# EAGLE board KickerBoard_rotated (EAGLE 9.2.0)
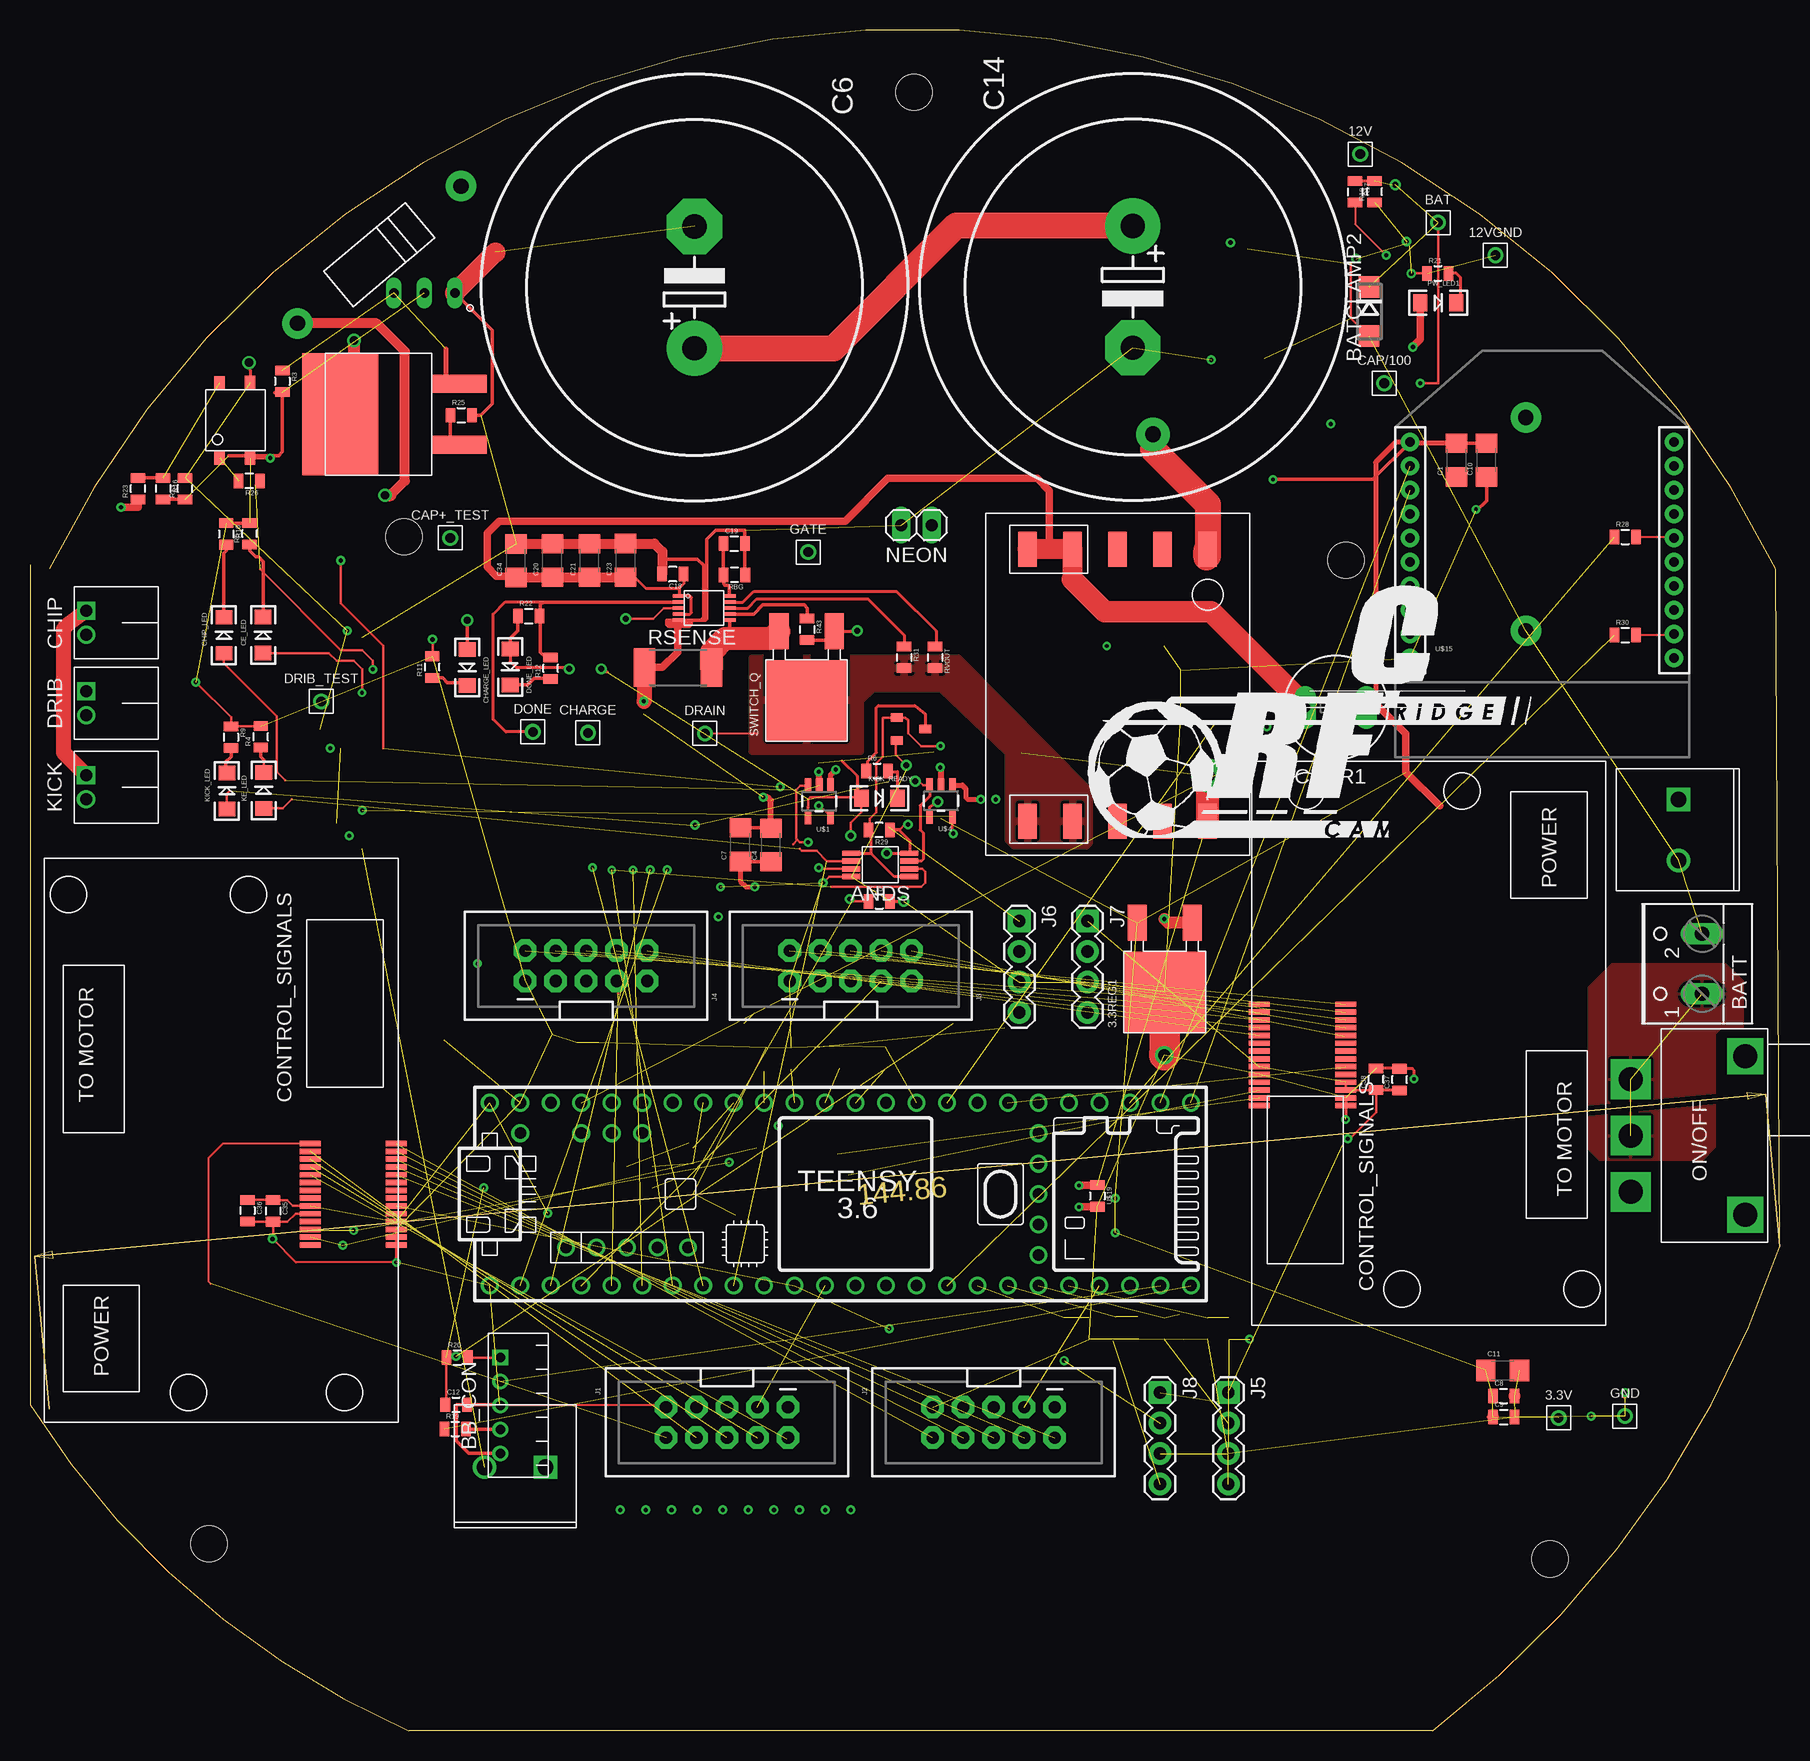
[diagram p0: board, top side]
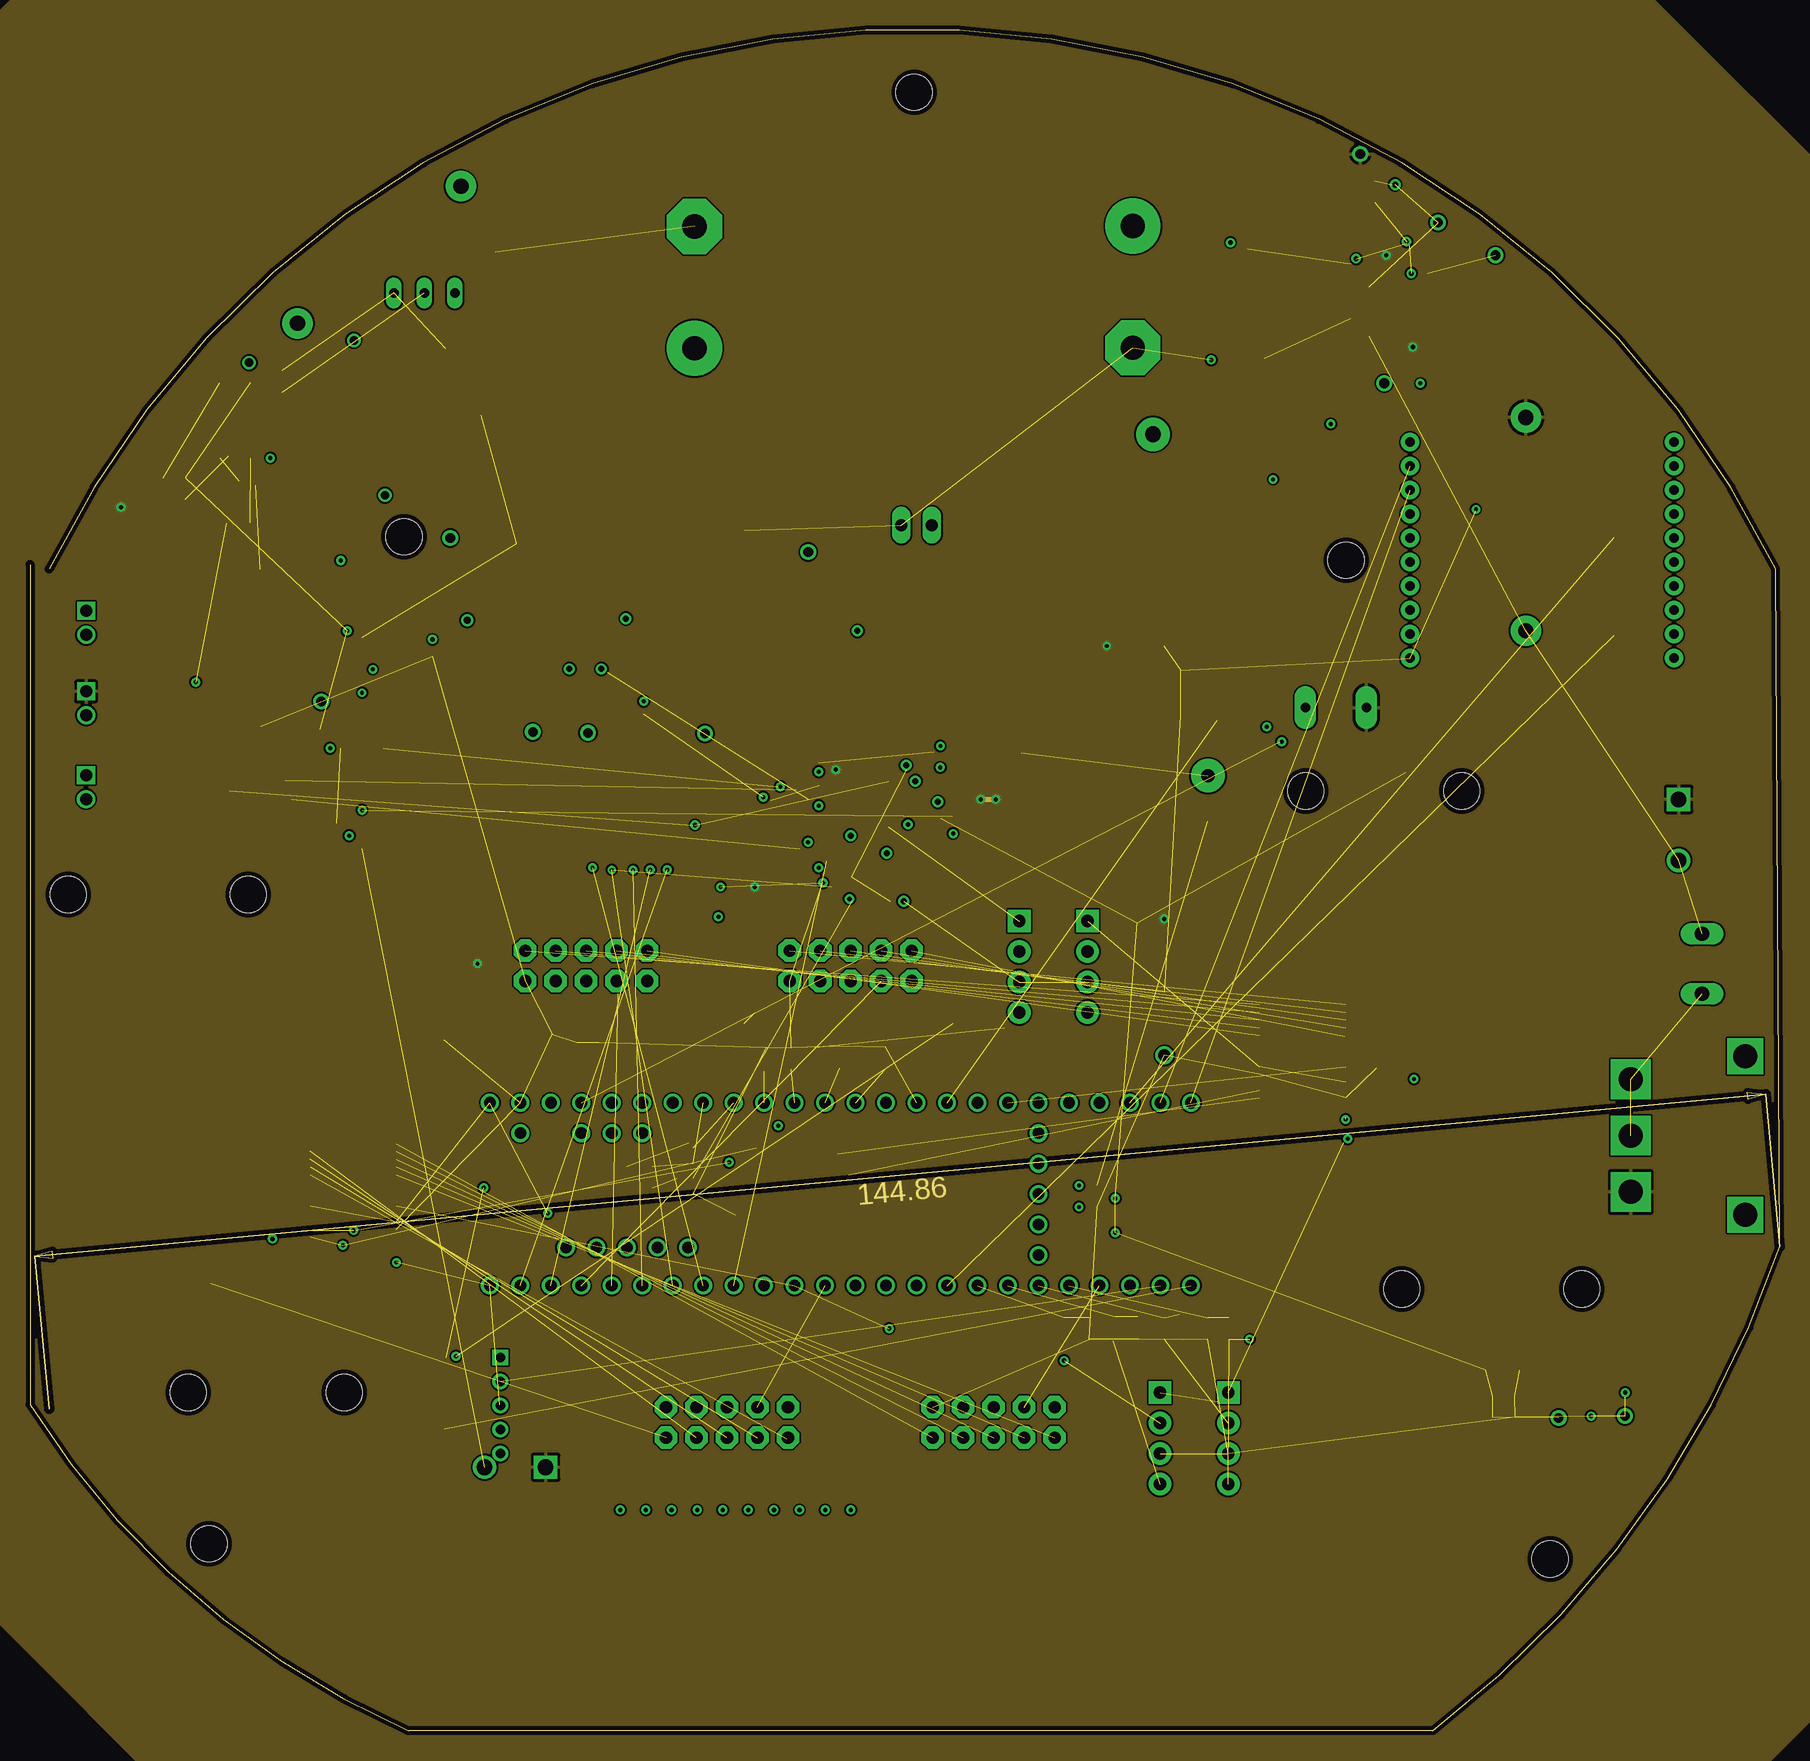
[diagram p1: board, inner layer 12V+]
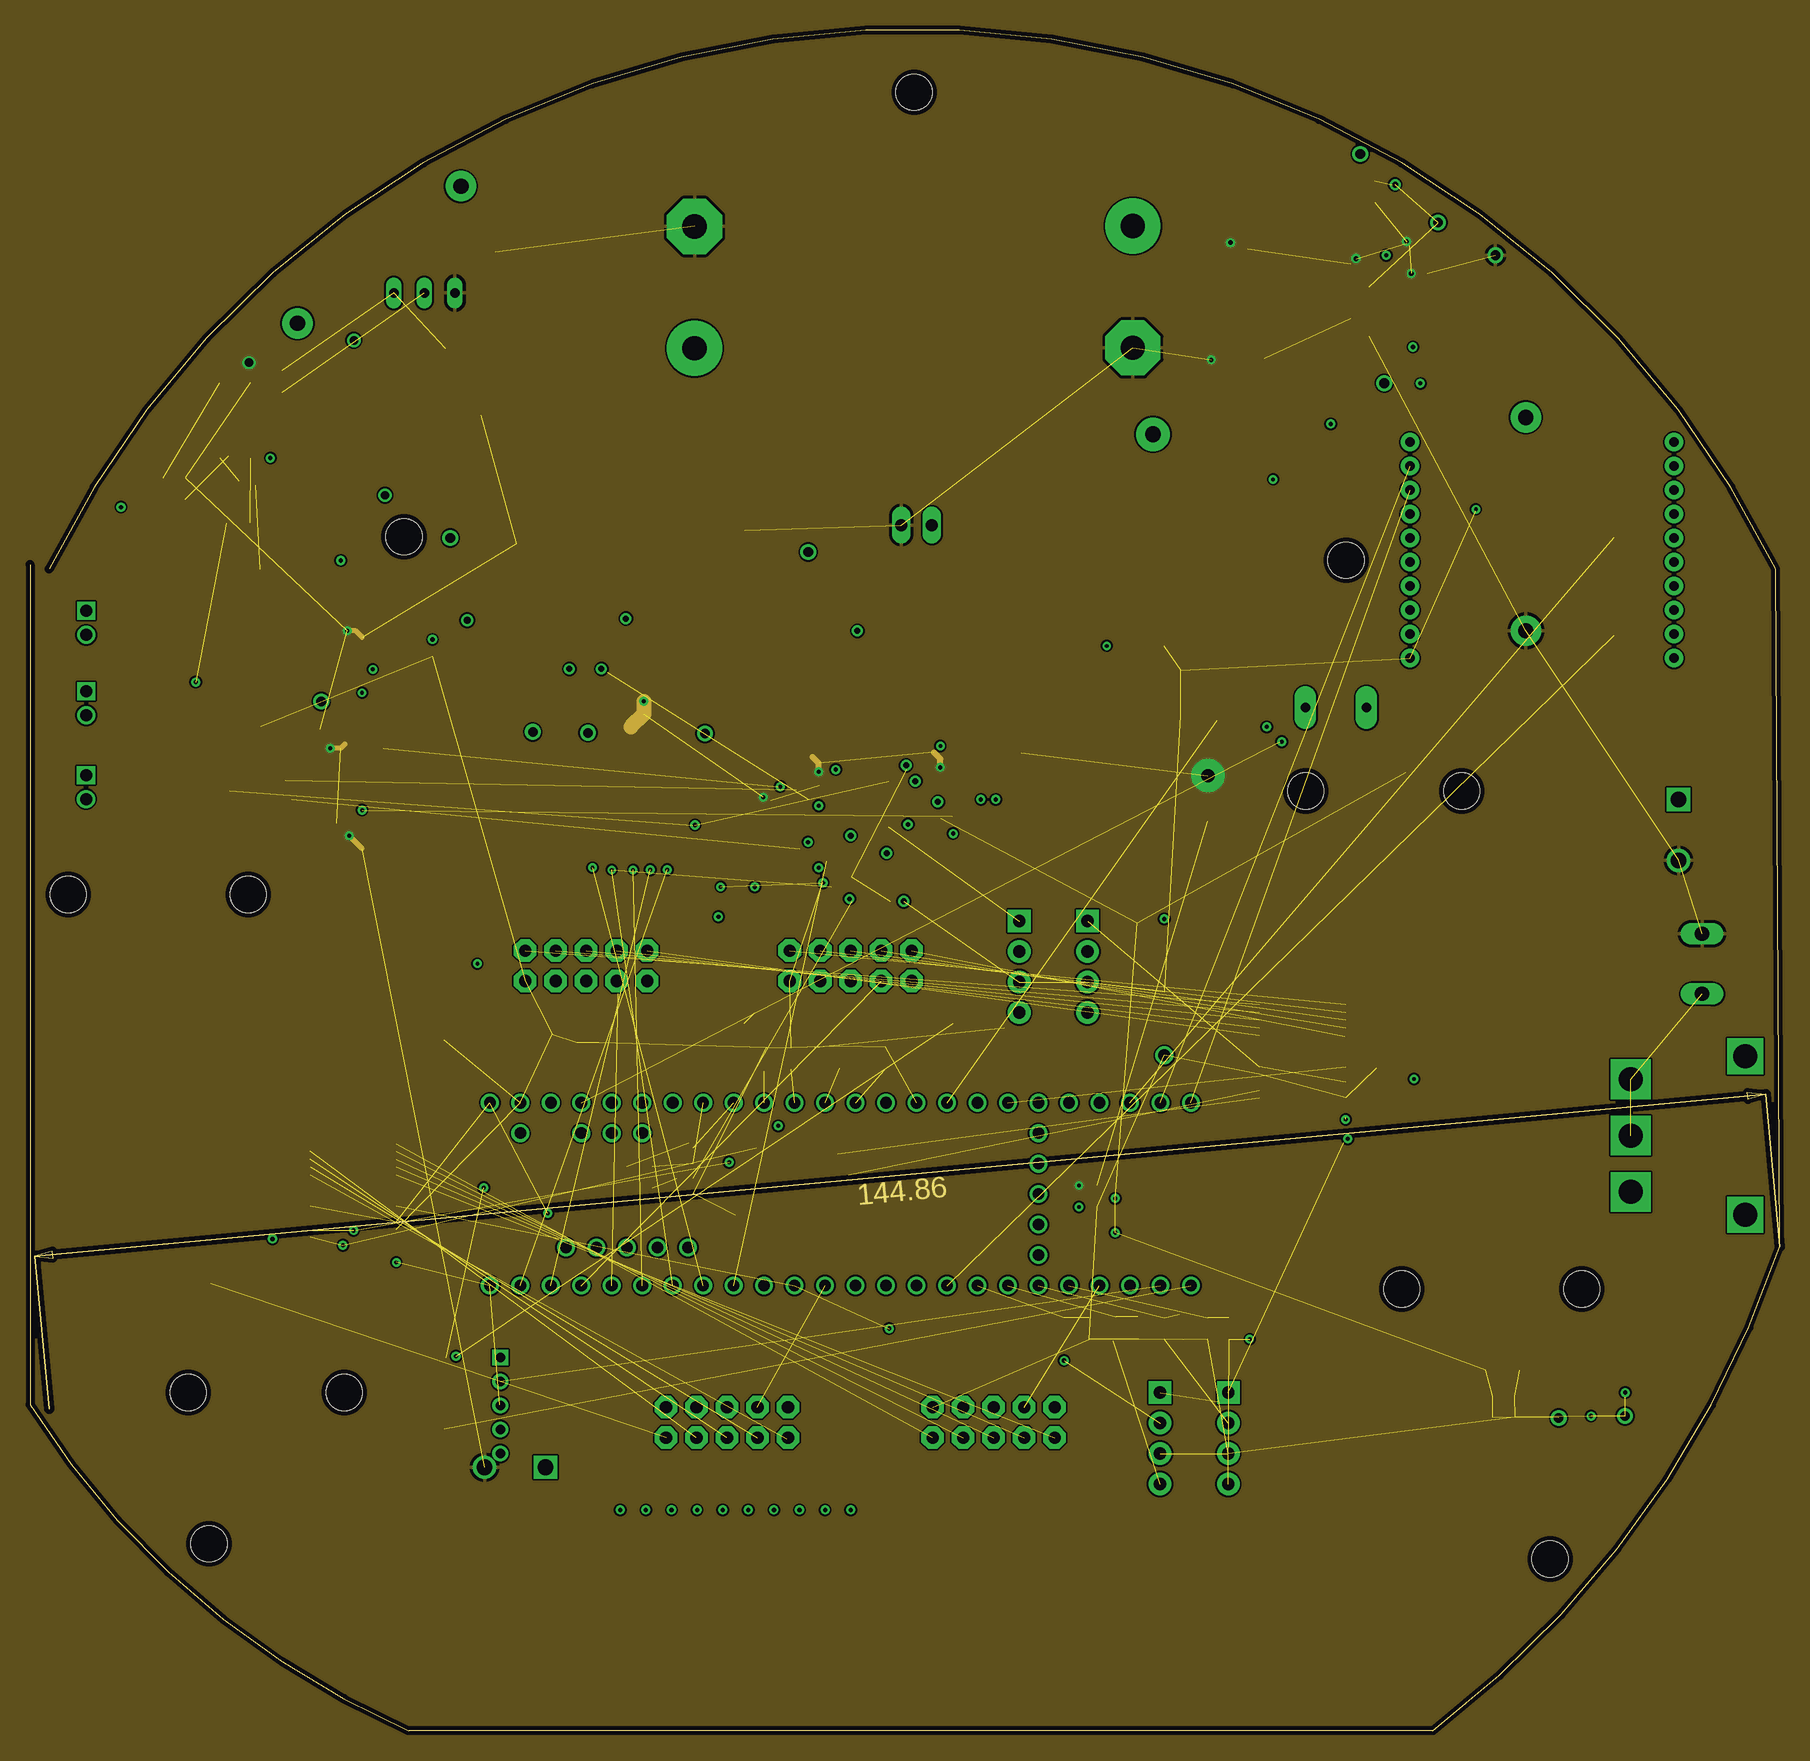
[diagram p2: board, inner layer 12VGND]
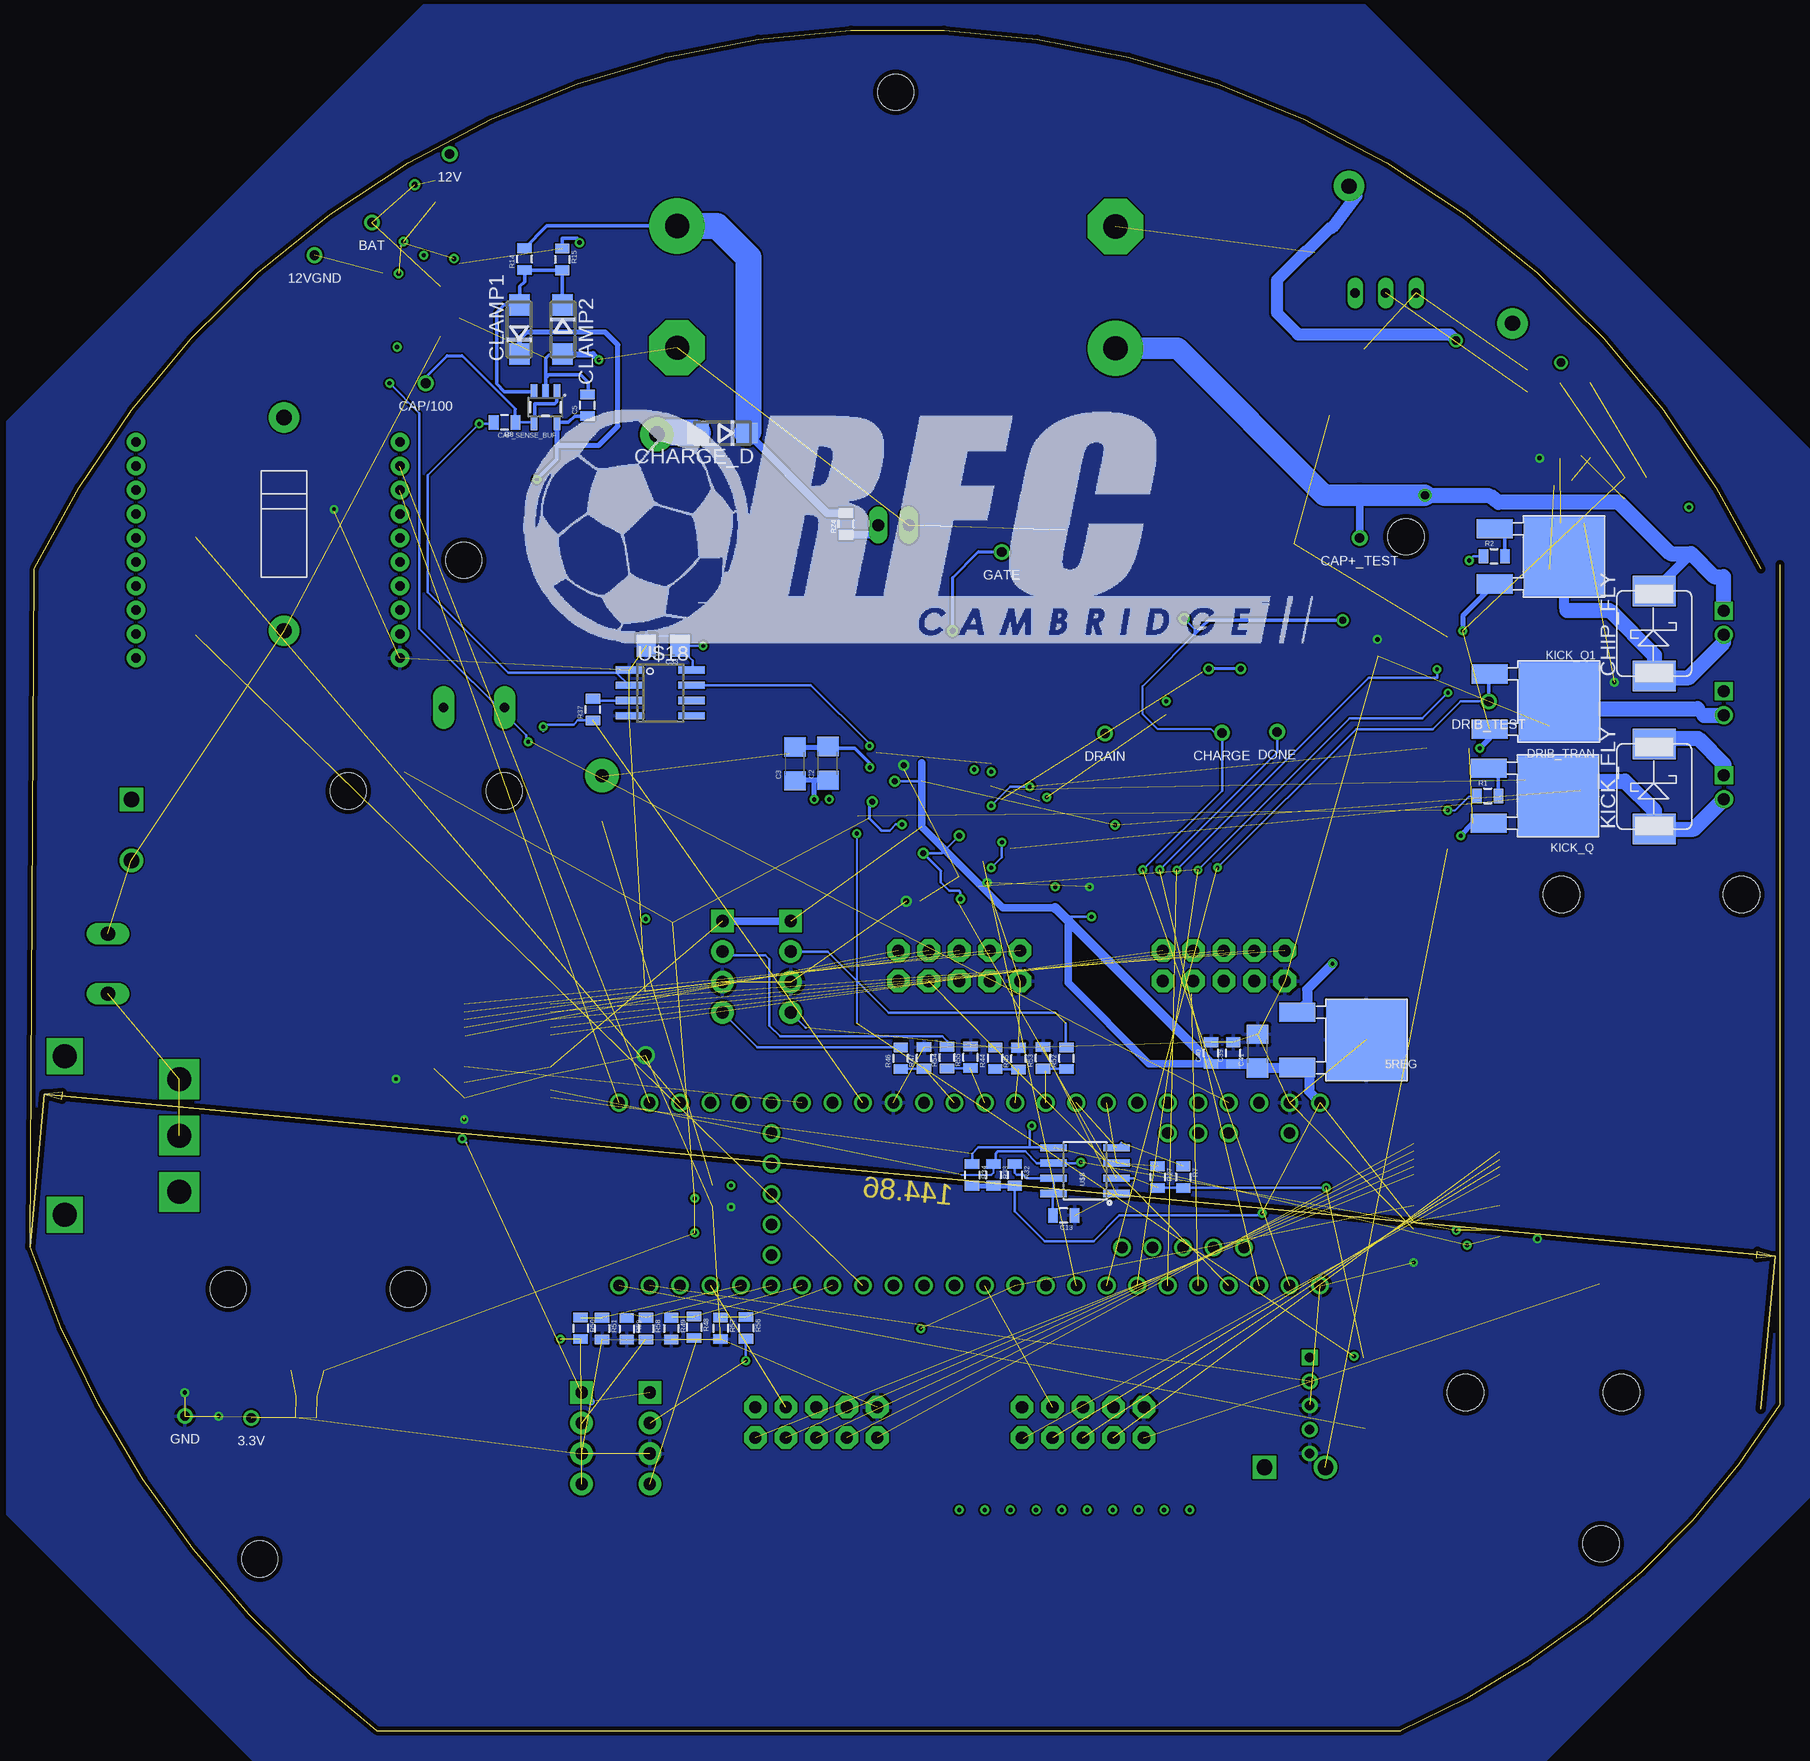
[diagram p3: board, bottom side, seen from below]

Size 145.83 x 141.72 mm. Coordinates in mm from the lower left corner, seen from the top.
Outline: 0,97.17 0,27.17 arc34 31.58,0 116.92,0 arc34 145.83,40.33 145.48,96.81 arc128 1.6,96.81
Copper layers (1*2*3*16): Top(3v3+) 0.035559375mm / dielectric 0.62mm / 12V+ 0.035559375mm / dielectric 0.62mm / 12VGND 0.035559375mm / dielectric 0.62mm / Bottom(3v3GND) 0.035559375mm
Design rules "typical_4pcb *": minimum track width 6mil, minimum drill 8mil, track to track 6mil, track to pad 6mil, pad to pad 6mil, via to via 6mil, smd to smd 6mil, copper to edge 15mil, drill to drill 8mil, minimum pad ring 10mil, minimum via ring 8mil, stop-mask expansion 4mil, vias tented up to drill 0mil, thermal gap 10mil
Holes 3 mm at 126.67,14.3 14.92,15.58 31.16,99.48 73.67,136.52 109.67,97.52

## Footprints (pad centres in the part's own frame; a part is rotated, then mirrored left to right if it is on the bottom)
DPAK = smd 6.7 x 6.7: DRAIN 0,0 | smd 3 x 1.6: GATE 5.75,-2.3; SOURCE 5.75,2.3
TESTING_PT = drill 0.8: P$1 0,0
TSSOP8 = smd 1.5 x 0.45: P$1 -2.4,0.975; P$2 -2.4,0.325; P$3 -2.4,-0.325; P$4 -2.4,-0.975; P$5 2.4,-0.975; P$6 2.4,-0.325; P$7 2.4,0.325; P$8 2.4,0.975
DO214AC = smd 1.8 x 1.7: A 2.05,0; C -2.05,0
W237-102 = drill 1.194 long: 1 -2.5,-1.27; 2 2.5,-1.27
JST-5-2MM = drill 0.8 square: 1 4,0 | drill 0.8: 2 2,0; 3 0,0; 4 -2,0; 5 -4,0
1206 = smd 1.6 x 1.8: 1 -1.4,0; 2 1.4,0
0805 = smd 0.8 x 1.2: 1 -0.9,0; 2 0.9,0
EB35D = drill 2.007 pad 4.597: + -5.08,0 | drill 2.007 pad 4.597 octagon: - 5.08,0
SOT23-5 = smd 0.55 x 1.2: 1 -0.95,-1.3; 2 0,-1.3; 3 0.95,-1.3; 4 0.95,1.3; 5 -0.95,1.3
LED-1206 = smd 1.2 x 1.4: A -1.5,0; C 1.5,0
10-MSOP = smd 0.97 x 0.31: P$1 -0.485,-0.155; P$2 -0.485,-0.655; P$3 -0.485,-1.155; P$4 -0.485,-1.655; P$5 -0.485,-2.155; P$6 3.785,-2.155; P$7 3.785,-1.655; P$8 3.785,-1.155; P$9 3.785,-0.655; P$10 3.785,-0.155
JST-2-2MM = drill 1 square: 1 1,1 | drill 1: 2 -1,1
DO214AB = smd 2.54 x 3.556: ANODE 0,3.111; CATHODE 7.112,3.111
2X5-SHROUDED = drill 1.016 pad 1.88 octagon: 1 -1.27,5.08; 2 1.27,5.08; 3 -1.27,2.54; 4 1.27,2.54; 5 -1.27,0; 6 1.27,0; 7 -1.27,-2.54; 8 1.27,-2.54; 9 -1.27,-5.08; 10 1.27,-5.08
1X04 = drill 1.016 pad 1.88 square: 1 0,0 | drill 1.016 pad 1.88: 2 2.54,0; 3 5.08,0; 4 7.62,0
TR5 = drill 0.813 pad 1.778 long: 1 -2.54,0; 2 2.54,0
1X02 = drill 1.016 long: 1 -1.27,0; 2 1.27,0
CK_SWITCH = drill 2 pad 3.302 square: COM 0,0; IN1 4.699,0; IN2 -4.699,0 | drill 2 pad 2.54 square: SUP1 -6.604,-9.525; SUP2 6.604,-9.525
R2512 = smd 1.8 x 3.2: 1 -2.8,0; 2 2.8,0
TO-263 = smd 1.524 x 4.572: LOWER_LEFT 2.54,-2.286; LOWER_RIGHT 7.62,-2.286 | smd 10.16 x 6.35: TAB 5.08,7.62
10-TRANSFORMER = smd 2.92 x 1.52: P$1 0,0; P$2 0,-3.75; P$3 0,-7.5; P$4 0,-11.25; P$5 0,-15; P$6 22.67,-15; P$7 22.67,-11.25; P$8 22.67,-7.5; P$9 22.67,-3.75; P$10 22.67,0
SOP4 = smd 0.889 x 1.143: 1 0.813,-0.584; 2 3.353,-0.584; 3 3.353,5.664; 4 0.813,5.639
TO92 = drill 0.8 long: CENTER 2.54,0; LEFT 0,0; RIGHT 5.08,0
THROUGH-HOLE-2 = drill 1.27 pad 2.54: + 0,0; - 17.78,0
SOIC8 = smd 0.61 x 2.21: 1 -1.905,-2.616; 2 -0.635,-2.616; 3 0.635,-2.616; 4 1.905,-2.616; 5 1.905,2.616; 6 0.635,2.616; 7 -0.635,2.616; 8 -1.905,2.616
MOTOR_BOARD = hole 3: 2.5,17.5; 2.5,4.5; 44,27.5; 44,12.5
1X02-PHEONIX = drill 1.3 square: 1 0,0 | drill 1.3: 2 5.08,0
TEENSY_3.5/3.6 = drill 0.965: 0/RX -25.4,-7.62; 1/TX -22.86,-7.62; 2 -20.32,-7.62; 3/CANTX -17.78,-7.62; 3V3 7.62,-7.62; 3V3_2 17.78,-2.54; 3V3_LO -22.86,7.62; 4/CANRX -15.24,-7.62; 5 -12.7,-7.62; 6 -10.16,-7.62; 7 -7.62,-7.62; 8 -5.08,-7.62; 9/CS -2.54,-7.62; 10/CS 0,-7.62; 11/MOSI 2.54,-7.62; 12/MISO 5.08,-7.62; 13/SCK 5.08,7.62; 14/A0 2.54,7.62; 15/A1 0,7.62; 16/A2 -2.54,7.62; 17/A3 -5.08,7.62; 18/A4/SDA -7.62,7.62; 19/A5/SCL -10.16,7.62; 20/A6 -12.7,7.62; 21/A7 -15.24,7.62; 21/DAC0 12.7,7.62; 22/A8 -17.78,7.62; 23/A9 -20.32,7.62; 24 10.16,-7.62; 25 12.7,-7.62; 26 15.24,-7.62; 27 17.78,-7.62; 28 20.32,-7.62; 29 22.86,-7.62; 30 25.4,-7.62; 31/A12 27.94,-7.62; 32/A13 30.48,-7.62; 33/A14 30.48,7.62; 34/A15 27.94,7.62; 35/A16 25.4,7.62; 36/A17 22.86,7.62; 37/A18 20.32,7.62; 38/A19 17.78,7.62; 39/A20 15.24,7.62; A10 -17.78,5.08; A11 -15.24,5.08; A22/DAC1 10.16,7.62; AGND -25.4,7.62; AREF -20.32,5.08; GND -27.94,-7.62; GND2 7.62,7.62; GND3 17.78,0; PROG 17.78,2.54; RESET 17.78,5.08; U5V -21.59,-4.445; UD+ -16.51,-4.445; UD- -19.05,-4.445; UGND1 -13.97,-4.445; UGND2 -11.43,-4.445; VBAT 17.78,-5.08; VIN -27.94,7.62; VUSB -25.4,5.08
XBEE-1 = drill 0.8 pad 1.524: 1 -11,20; 2 -11,18; 3 -11,16; 4 -11,14; 5 -11,12; 6 -11,10; 7 -11,8; 8 -11,6; 9 -11,4; 10 -11,2; 11 11,2; 12 11,4; 13 11,6; 14 11,8; 15 11,10; 16 11,12; 17 11,14; 18 11,16; 19 11,18; 20 11,20
SSOP = smd 0.45 x 1.75: 1 0,0; 2 0.65,0; 3 1.3,0; 4 1.95,0; 5 2.6,0; 6 3.25,0; 7 3.9,0; 8 4.55,0; 9 5.2,0; 10 5.85,0; 11 6.5,0; 12 7.15,0; 13 7.8,0; 14 8.45,0; 15 8.45,7.2; 16 7.8,7.2; 17 7.15,7.2; 18 6.5,7.2; 19 5.85,7.2; 20 5.2,7.2; 21 4.55,7.2; 22 3.9,7.2; 23 3.25,7.2; 24 2.6,7.2; 25 1.95,7.2; 26 1.3,7.2; 27 0.65,7.2; 28 0,7.2
SOIC8' = smd 0.6 x 2.2: 1 -1.905,-2.6; 2 -0.635,-2.6; 3 0.635,-2.6; 4 1.905,-2.6; 5 1.905,2.6; 6 0.635,2.6; 7 -0.635,2.6; 8 -1.905,2.6
SOT-23 = smd 1 x 0.7: D 0,0; G -2.4,0.95; S -2.4,-0.95

## Placement (x,y rotation side)
3.3REG1  3.3REG1AREG  [DPAK]  94.56,61.56 90 top
3.3V  TEST_PT  [TESTING_PT]  127.39,26.06 0 top
5REG  3.3REG1AREG  [DPAK]  34.46,57.56 180 bottom
12V  TEST_PT  [TESTING_PT]  110.86,131.38 0 top
12VGND  TEST_PT  [TESTING_PT]  122.12,122.95 0 top
ANDS  AND-DUAL  [TSSOP8]  70.85,72.14 0 top
BAT  TEST_PT  [TESTING_PT]  117.34,125.68 0 top
BATCLAMP2  DIODE-ZENERDO214AC  [DO214AC]  111.59,118.26 270 top
BATT  [W237-102]  138.07,63.91 90 top
BB_CON  JST-5  [JST-5-2MM]  39.19,27.1 90 top
C1  1uF  [1206]  118.89,105.87 90 top
C2  .1uF  [1206]  79.34,80.61 90 bottom
C3  10uF  [1206]  82.08,80.56 90 bottom
C4  .1uF  [1206]  61.75,73.81 90 top
C5  .1uF  [0805]  99.38,110.45 90 bottom
C6  1500uF  [EB35D]  55.38,120.27 90 top
C7  10uF  [1206]  59.2,73.83 90 top
C8  1uF  [0805]  122.8,27.89 0 top
C9  .01uF  [0805]  122.82,26.13 0 top
C10  .01uF  [1206]  121.38,105.87 90 top
C11  47uF  [1206]  122.72,30.02 0 top
C12  4.7uF  [0805]  35.5,27.16 0 top
C13  100nF  [0805]  59.68,42.93 180 bottom
C14  1500uF  [EB35D]  91.91,120.31 270 top
C15  .1uF  [0805]  70.77,69.1 0 top
C18  10uF  [0805]  53.56,96.38 180 top
C19  100pF  [0805]  58.69,98.92 0 top
C20  47uF  [1206]  43.53,97.51 90 top
C21  47uF  [1206]  46.62,97.52 90 top
C23  47uF  [1206]  49.64,97.52 90 top
C33  1uF  [1206]  93.07,90.41 180 bottom
C34  47uF  [1206]  40.5,97.49 90 top
C35  100nF  [0805]  20.26,43.31 270 top
C36  2.2uF  [0805]  18.13,43.34 270 top
C37  100nF  [0805]  114.14,54.26 90 top
C38  2.2uF  [0805]  112.18,54.28 90 top
C39  1uF  [0805]  45.56,56.47 90 bottom
C40  .01uF  [0805]  47.41,56.47 90 bottom
C41  47uF  [1206]  43.53,56.62 90 bottom
CAP+_TEST  TEST_PT  [TESTING_PT]  35.02,99.39 0 top
CAP/100  TEST_PT  [TESTING_PT]  112.85,112.29 0 top
CAP_SENSE_BUF  MCP6291T-E/OT  [SOT23-5]  102.87,110.28 180 bottom
CE_LED  [LED-1206]  19.42,91.29 90 top
CHARGE  TEST_PT  [TESTING_PT]  46.5,83.15 0 top
CHARGE_D  1kV, ultrafast  [DO214AC]  88.12,108.14 180 bottom
CHARGE_LED  [LED-1206]  36.43,88.6 270 top
CHARGE_U  LT3750  [10-MSOP]  54.53,94.7 0 top
CHIP  JST-22MM  [JST-2-2MM]  5.69,92.31 90 top
CHIP_FLY  DIODE-ZENERDO214AB  [DO214AB]  7.36,87.87 90 bottom
CHIP_LED  [LED-1206]  16.16,91.28 90 top
CLAMP1  DIODE-ZENERDO214AC  [DO214AC]  105.05,116.75 90 bottom
CLAMP2  DIODE-ZENERDO214AC  [DO214AC]  101.44,116.76 270 bottom
DONE  TEST_PT  [TESTING_PT]  41.9,83.23 0 top
DONE_LED  [LED-1206]  40.01,88.65 270 top
DRAIN  TEST_PT  [TESTING_PT]  56.25,83.11 0 top
DRIB  JST-22MM  [JST-2-2MM]  5.68,85.61 90 top
DRIB_TEST  TEST_PT  [TESTING_PT]  24.27,85.77 0 top
DRIB_TRAN  [DPAK]  18.44,85.76 180 bottom
GATE  TEST_PT  [TESTING_PT]  64.85,98.21 0 top
GND  TEST_PT  [TESTING_PT]  132.91,26.21 0 top
J1  [2X5-SHROUDED]  58.08,25.68 270 top
J2  [2X5-SHROUDED]  80.31,25.68 270 top
J3  [2X5-SHROUDED]  68.39,63.73 90 top
J4  [2X5-SHROUDED]  46.35,63.73 90 top
J5  [1X04]  99.86,28.17 270 top
J6  [1X04]  82.44,67.47 270 top
J7  [1X04]  88.13,67.47 270 top
J8  [1X04]  94.17,28.17 270 top
KE_LED  [LED-1206]  19.47,78.35 90 top
KICK  JST-22MM  [JST-2-2MM]  5.67,78.63 90 top
KICK_FLY  DIODE-ZENERDO214AB  [DO214AB]  7.36,75.12 90 bottom
KICK_LED  [LED-1206]  16.41,78.31 90 top
KICK_Q  [DPAK]  18.51,77.91 180 bottom
KICK_Q1  [DPAK]  18.01,97.86 180 bottom
KICK_READY  [LED-1206]  70.78,77.69 0 top
KICKER1  [TR5]  108.83,85.25 180 top
NEON  [1X02]  73.88,100.46 180 top
ON/OFF  SPDT-SWITCH  [CK_SWITCH]  133.4,49.59 90 top
PW_LED1  [LED-1206]  117.36,118.98 0 top
R1  100  [0805]  24.36,77.9 0 bottom
R2  100  [0805]  23.82,97.87 0 bottom
R3  250k  [0805]  21.04,112.45 270 top
R4  1k  [0805]  19.23,82.82 90 top
R5  1k  [0805]  18.3,99.75 90 top
R6  1k  [0805]  70.59,79.98 0 top
R7  4.7k  [0805]  49.72,46.13 270 bottom
R8  1k  [0805]  106.29,109.02 180 bottom
R9  1k  [0805]  16.75,82.79 270 top
R10  1k  [0805]  16.35,99.72 270 top
R11  1k  [0805]  33.52,88.63 90 top
R12  1k  [0805]  43.39,88.54 90 top
R13  2.5k  [0805]  12.93,103.5 90 top
R14  1M  [0805]  104.61,122.64 90 bottom
R15  10K  [0805]  101.48,122.6 270 bottom
R16  1k  [0805]  11.1,103.5 270 top
R17  80k  [0805]  110.43,128.23 270 top
R18  20k  [0805]  112.06,128.25 90 top
R19  20  [0805]  35.44,25.14 0 top
R20  100  [0805]  35.6,31.08 0 top
R21  1k  [0805]  117.32,121.44 0 top
R22  100k  [0805]  41.57,92.88 0 top
R23  1.5k  [0805]  9,103.5 90 top
R24  536k  [0805]  77.82,100.56 90 bottom
R25  200  [0805]  35.94,109.61 0 top
R26  300  [0805]  18.28,104.15 180 top
R27  4.7k  [0805]  51.86,46.13 270 bottom
R28  0  [0805]  132.93,99.47 0 top
R29  1M  [0805]  70.76,75.05 180 top
R30  0  [0805]  132.93,91.29 0 top
R31  43k  [0805]  72.85,89.44 270 top
R32  200k  [0805]  63.77,46.31 270 bottom
R33  4.7k  [0805]  65.55,46.31 270 bottom
R34  4.7k  [0805]  67.33,46.31 270 bottom
R37  100k  [0805]  98.92,85.09 90 bottom
R43  100  [0805]  64.76,91.77 270 top
R44  39k  [0805]  65.4,56.04 90 bottom
R45  75k  [0805]  63.44,56.01 90 bottom
R46  39k  [0805]  73.27,56.04 90 bottom
R47  75k  [0805]  71.31,56.06 90 bottom
R48  39k  [0805]  90.49,33.61 270 bottom
R49  75k  [0805]  92.4,33.51 270 bottom
R50  39k  [0805]  99.94,33.53 270 bottom
R51  75k  [0805]  98.16,33.51 270 bottom
R52  39k  [0805]  59.45,56.04 90 bottom
R53  75k  [0805]  61.41,56.06 90 bottom
R54  39k  [0805]  69.41,56.09 90 bottom
R55  75k  [0805]  67.45,56.11 90 bottom
R56  39k  [0805]  86.15,33.56 270 bottom
R57  75k  [0805]  88.28,33.53 270 bottom
R58  39k  [0805]  94.5,33.51 270 bottom
R59  75k  [0805]  96.1,33.48 270 bottom
RBG  2.49k  [0805]  58.7,96.31 180 top
RSENSE  10m  [R2512]  53.99,88.59 0 top
RVOUT  50.4k  [0805]  75.43,89.44 270 top
SWITCH_Q  [DPAK]  64.72,85.86 90 top
U$1  FAN31111  [SOT23-5]  65.77,77.45 180 top
U$2  IXTA3N50D2  [TO-263]  33.48,104.62 90 top
U$3  32052-TRANSFORMER  [10-TRANSFORMER]  98.13,98.46 270 top
U$4  FAN31111  [SOT23-5]  75.92,77.48 180 top
U$5  VO1400AEFTR  [SOP4]  14.99,106.67 0 top
U$6  ZTX718  [TO92]  35.41,119.81 180 top
U$7  1N4007  [THROUGH-HOLE-2]  22.29,117.28 40 top
U$8  PCA9306  [SOIC8]  57.9,46.66 90 bottom
U$9  MOTOR_BOARD  [MOTOR_BOARD]  30.7,25.68 90 top
U$10  MOTOR_BOARD  [MOTOR_BOARD]  101.82,80.8 270 top
U$11  PHEONIX-SCREW-TERM  [1X02-PHEONIX]  137.38,77.6 270 top
U$12  13VZENER  [THROUGH-HOLE-2]  124.66,91.66 90 bottom
U$13  PHEONIX-SCREW-TERM  [1X02-PHEONIX]  42.97,21.95 180 top
U$14  TEENSY_3.5/3.6  [TEENSY_3.5/3.6]  66.26,44.71 0 top
U$15  XBEE-1B1  [XBEE-1]  126,87.38 0 top
U$17  IO-EXPANDER  [SSOP]  23.33,48.92 270 top
U$18  LM311  [SOIC8']  93.31,86.48 270 bottom
U$19  INDUCTOR  [0805]  88.94,44.56 270 top
U$21  IO-EXPANDER  [SSOP]  102.43,60.53 270 top
U$22  N-FET  [SOT-23]  74.62,83.47 0 top

## Library data of the parts
3.3REG1 3.3V 5REG 12V 12VGND ANDS BAT BATCLAMP2 BB_CON CAP+_TEST CAP/100 CHARGE CHARGE_D CHIP CHIP_FLY CLAMP1 CLAMP2 DONE DRAIN DRIB DRIB_TEST DRIB_TRAN GATE GND KICK KICK_FLY KICK_Q KICK_Q1 ON/OFF SWITCH_Q U$3 U$15 U$19 = gen3
BATT = con-wago-500; MPN: 237-102; OC_FARNELL: unknown; OC_NEWARK: 70K9898
C1-C5 C7-C13 C15 C18-C21 C23 C33-C41 = SparkFun-Capacitors
C6 C14 = rcl; SPICEPREFIX: C
CAP_SENSE_BUF = SparkFun-AnalogIC; PROD_ID: IC-11991
CE_LED CHARGE_LED CHIP_LED DONE_LED KE_LED KICK_LED KICK_READY PW_LED1 = SparkFun-LED
CHARGE_U U$1 U$4 = kickerchips
J1-J4 U$11 U$13 = SparkFun-Connectors
J5-J8 = SparkFun-Connectors; PROD_ID: CONN-09696
KICKER1 = fuse; OC_FARNELL: unknown; OC_NEWARK: unknown
NEON = pinhead
R1 R2 R7 R14 R15 R27 R28 R30 R32-R34 = SparkFun-Resistors
R3-R6 R8-R13 R16-R26 R29 R31 R37 R43-R59 RBG RSENSE RVOUT = SparkFun-Passives
U$2 U$5-U$7 U$12 U$22 = rfc
U$8 = SparkFun-AnalogIC
U$9 U$10 U$17 U$21 = Kicker
U$14 = Teensy356
U$18 = foe-scale

## Nets
3.3V: 3.3REG1.SOURCE 3.3V.P$1 ANDS.P$8 C1.2 C5.1 C8.1 C9.1 C10.2 C11.1 C12.1 C15.1 CAP_SENSE_BUF.5 CLAMP1.C DONE_LED.A KICK_READY.A R7.2 R20.1 R22.1 R27.2 R29.1 U$1.4 U$4.4 U$8.2 U$15.1
5V: 5REG.SOURCE C35.1 C36.1 C37.1 C38.1 C39.1 C40.1 C41.1 J5.1 J6.1 J7.1 J8.1 R32.2 R33.2 R34.2 U$14.VIN U$17.9 U$17.18 U$21.9 U$21.17 U$21.18
12V: 3.3REG1.GATE 5REG.GATE 12V.P$1 C2.1 C3.1 C4.1 C7.1 C33.1 DRIB.1 KICKER1.1 ON/OFF.IN2 PW_LED1.A R17.2 R23.1 U$1.1 U$4.1 U$11.1 U$12.- U$13.1 U$18.8
12V-KICKER: C18.1 C20.1 C21.1 C23.1 C34.1 CHARGE_U.P$1 CHARGE_U.P$4 KICKER1.2 U$3.P$4 U$3.P$5
12VGND: 12VGND.P$1 BATCLAMP2.A BATT.2 C2.2 C3.2 C4.2 C5.2 C6.- C7.2 C14.- C18.2 C19.2 C20.2 C21.2 C23.2 C34.2 CAP_SENSE_BUF.2 CHARGE_U.P$5 CLAMP2.A DRIB_TRAN.SOURCE KICK_Q1.SOURCE KICK_Q.SOURCE NEON.2 R13.2 R15.1 R18.1 R21.1 R25.2 RBG.1 RSENSE.1 U$1.2 U$3.P$10 U$4.2 U$5.3 U$6.LEFT U$11.2 U$12.+ U$13.2 U$19.1
BAT+: BATT.1 ON/OFF.COM ON/OFF.IN1
BATSENSE: BAT.P$1 BATCLAMP2.C R17.1 R18.2 U$14.23/A9
BB_IN: BB_CON.2 U$14.31/A12
BB_OUT: R19.1 U$14.32/A13
BREN0: J1.6 U$17.3
BREN1: J3.6 U$21.26
BREN2: J4.6 U$21.3
BREN3: J2.6 U$17.26
CAP+: C6.+ C14.+ CAP+_TEST.P$1 CHARGE_D.C CHIP.1 CHIP_FLY.CATHODE KICK.1 KICK_FLY.CATHODE R14.2 R24.2 U$7.+
CHARGE: CHARGE.P$1 CHARGE_LED.A CHARGE_U.P$3 U$14.0/RX
CHARGE_DONE: CHARGE_U.P$2 DONE.P$1 R12.2 R22.2 U$14.1/TX
CHIP: ANDS.P$3 CHIP_LED.A U$1.3
CHIP_ENABLE: ANDS.P$6 CE_LED.A U$14.5
COMP_OUT: ANDS.P$1 ANDS.P$5 R29.2 U$18.7 U$22.G
CTS: R30.1 U$14.24
DIR0: J1.8 U$17.2
DIR1: J3.4 U$21.27
DIR2: J4.4 U$21.2
DIR3: J2.8 U$17.27
DISCHARGE: R26.1 U$14.4/CANRX
DIVCAP: CAP/100.P$1 CAP_SENSE_BUF.1 CAP_SENSE_BUF.4 R8.1
DRIB: DRIB_TEST.P$1 DRIB_TRAN.GATE U$14.6
ENABLE0: J1.4 U$17.4
ENABLE1: J3.8 U$21.25
ENABLE2: J4.8 U$21.4
ENABLE3: J2.4 U$17.25
FAULT0: J1.2 U$17.5
FAULT1: J3.10 U$21.24
FAULT2: J4.10 U$21.5
FAULT3: J2.2 U$17.24
GND: 3.3REG1.DRAIN 5REG.DRAIN ANDS.P$4 BB_CON.3 BB_CON.5 C8.2 C9.2 C10.1 C11.2 C12.2 C13.1 C15.2 C33.2 C35.2 C36.2 C37.2 C38.2 C39.2 C40.2 C41.2 GND.P$1 J1.9 J2.9 J3.1 J4.1 J5.3 J6.3 J7.3 J8.3 R4.2 R5.2 R9.1 R10.1 R11.2 R45.2 R47.2 R49.2 R51.2 R53.2 R55.2 R57.2 R59.2 U$5.2 U$8.1 U$14.AGND U$14.GND U$14.GND2 U$15.10 U$17.10 U$17.15 U$17.16 U$17.17 U$18.1 U$18.4 U$19.2 U$21.10 U$21.15 U$21.16 U$22.S
HALLOUT0: J1.1
HALLOUT1: J3.9
HALLOUT2: J4.9
HALLOUT3: J2.1
INT1: U$14.9/CS U$17.20
INT2: U$14.39/A20 U$21.20
KICK: ANDS.P$7 KICK_LED.A U$4.3
KICK_ENABLE: ANDS.P$2 KE_LED.A U$14.7
KICK_REF: R37.1 U$14.A22/DAC1
LOCKN0: J1.10 U$17.1
LOCKN1: J3.2 U$21.28
LOCKN2: J4.2 U$21.1
LOCKN3: J2.10 U$17.28
LOWCHIP: CHIP.2 CHIP_FLY.ANODE KICK_Q1.DRAIN
LOWKICK: KICK.2 KICK_FLY.ANODE KICK_Q.DRAIN
M1QA-1: J5.2 R58.2
M1QA-1OUT: R58.1 R59.1 U$14.27
M1QA-2: J6.2 R52.2
M1QA-2OUT: R52.1 R53.1 U$14.17/A3
M1QA-3: J7.2 R54.2
M1QA-3OUT: R54.1 R55.1 U$14.15/A1
M1QA-4: J8.2 R56.2
M1QA-4OUT: R56.1 R57.1 U$14.25
M1QB-1: J5.4 R50.2
M1QB-1OUT: R50.1 R51.1 U$14.28
M1QB-2: J6.4 R44.2
M1QB-2OUT: R44.1 R45.1 U$14.16/A2
M1QB-3: J7.4 R46.2
M1QB-3OUT: R46.1 R47.1 U$14.14/A0
M1QB-4: J8.4 R48.2
M1QB-4OUT: R48.1 R49.1 U$14.26
N$1: DRAIN.P$1 R31.2 RVOUT.2 SWITCH_Q.DRAIN U$3.P$6 U$3.P$7
N$2: R1.1 U$4.5
N$3: KICK_Q1.GATE R2.2
N$4: R28.2 U$15.16
N$5: R2.1 U$1.5
N$6: CHARGE_U.P$8 R31.1
N$7: C19.1 CHARGE_U.P$10 RBG.2
N$8: KICK_Q.GATE R1.2
N$9: GATE.P$1 R43.2 SWITCH_Q.GATE
N$10: R3.1 U$2.LOWER_RIGHT U$6.RIGHT
N$11: KE_LED.C R4.1
N$12: CHARGE_U.P$9 RVOUT.1
N$13: CE_LED.C R5.1
N$14: R6.1 U$22.D
N$15: KICK_LED.C R9.2
N$16: R30.2 U$15.12
N$17: CHIP_LED.C R10.2
N$18: R3.2 R13.1 R16.2 U$6.CENTER
N$19: DONE_LED.C R12.1
N$20: CHARGE_LED.C R11.1
N$21: R25.1 U$2.LOWER_LEFT
N$22: C1.1
N$23: PW_LED1.C R21.2
N$24: CHARGE_U.P$6 RSENSE.2 SWITCH_Q.SOURCE
N$29: R16.1 R23.2 U$5.4
N$30: R26.2 U$5.1
N$32: BB_CON.4 R19.2
N$33: KICK_READY.C R6.2
N$34: CHARGE_U.P$7 R43.1
N$35: R8.2 U$18.2
N$36: U$2.TAB U$7.-
N$38: C13.2 R32.1 U$8.7 U$8.8
N$40: BB_CON.1 R20.2
N$65: R37.2 U$18.3
PWM0: J1.3 U$14.10/CS
PWM1: J3.7 U$14.2
PWM2: J4.7 U$14.3/CANTX
PWM3: J2.3 U$14.29
RTS: R28.1 U$14.35/A16
RX: U$14.34/A15 U$15.2
SCL: R27.1 U$8.3 U$14.19/A5/SCL
SCL-H: R33.1 U$8.6 U$17.12 U$21.12
SDA: R7.1 U$8.4 U$14.18/A4/SDA
SDA-H: R34.1 U$8.5 U$17.13 U$21.13
TO_DRIB: DRIB.2 DRIB_TRAN.DRAIN
TO_NEON: NEON.1 R24.1
TRANS_OUT: CHARGE_D.A U$3.P$1
TX: U$14.33/A14 U$15.3
UNBUF_DIVCAP: CAP_SENSE_BUF.3 CLAMP1.A CLAMP2.C R14.1 R15.2
XBRST: U$15.5

## Tracks (layer width: path | path; a pad name or v marks a point on that pad's centre or on a via)
3.3V  (via drill 0.3, 0.35, 0.38, 0.5)  (12 unrouted)
  Top(3v3+) 0.203: U$1.4 64.82,76.89 | 64.82,76.89 64.82,76.97 | R20.1 34.7,27.26 C12.1 | C15.1 68.51,69.1 v68.29,69.32 | 71.72,75.11 72.51,75.11 72.91,75.52 v73.17,75.52 | 68.93,77.69 KICK_READY.A | KICK_READY.A 69.28,76.53 68.39,75.64 v68.39,74.58 | 64.82,76.89 64.84,76.91 64.84,77.6 65.02,77.78 69.2,77.78 KICK_READY.A
  Top(3v3+) 0.254: v71.39,73.13 73.24,73.13 ANDS.P$8 73.32,73.19 73.32,74.15 72.41,75.05 R29.1 71.72,75.11 | U$4.4 74.97,76.97 v75.66,77.4 | DONE_LED.A 40.01,89.09 40.5,88.6 44.82,88.6 v44.95,88.47 | v47.62,88.47 47.87,88.47 48.12,88.22 | 67.68,80.8 68.93,79.56 68.93,77.69
  Top(3v3+) 0.305: DONE_LED.A 40.01,91.03 40.63,91.65 40.63,92.85 R22.1 | v103.6,104.27 111.89,104.27 U$15.1 | C10.2 C1.2
  Top(3v3+) 0.406: C1.2 115.11,107.27 U$15.1 113.82,107.38 112.13,105.69 112.13,85.42
  Top(3v3+) 0.61: 112.13,85.42 112.31,85.42 114.65,83.09 114.65,79.88 117.47,77.06
  Top(3v3+) 1.016: C9.1 121.9,26.14
  Bottom(3v3GND) 0.2: R27.2 R7.2
  Bottom(3v3GND) 0.203: v68.29,69.32 68.29,69.88 68.39,69.98 69.21,69.98 69.92,70.69 69.92,71.66 | v73.17,75.52 73.68,75.52 74.18,75.01 74.9,75.01 74.95,75.06 | v68.39,74.58 69.84,73.13 v71.39,73.13 | R7.2 37.82,45.23 v37.81,45.24 | U$8.2 53.89,46.03
  Bottom(3v3GND) 0.254: 69.92,71.66 v71.39,73.13 | v75.66,77.4 75.91,77.14 75.91,76.03 74.95,75.06 | v44.95,88.47 v47.62,88.47
  Bottom(3v3GND) 0.305: C5.1 100.45,109.55 100.96,109.05 101.85,109.05 CAP_SENSE_BUF.5 | 101.92,107.12 101.92,105.95 v103.6,104.27
  Bottom(3v3GND) 0.406: CAP_SENSE_BUF.5 101.92,107.12 98.44,107.12 96.84,108.72 96.84,115.47 97.91,116.54 104.49,116.54 105.05,115.97 CLAMP1.C
  other vias: 90.44,41.51 90.44,44.35
5V  (via drill 0.35)  (8 unrouted)
  Top(3v3+) 0.203: C36.1 20.24,44.24 C35.1 21.42,44.21 21.9,43.72 U$17.9 | U$21.18 U$21.17 C38.1 112.18,51.51 110,49.33 v109.82,49.33 | U$17.18 30.51,42.4
  Top(3v3+) 0.254: C37.1 112.21,53.36 C38.1 | U$21.17
  Bottom(3v3GND) 0.203: R32.2 63.77,43.28 61.28,40.8 57.19,40.8 55.06,42.93 43.15,42.93 v43.15,43.11 | v57.37,67.82 59.15,67.82 59.33,67.64 | v109.82,49.33 109.47,48.97
  Bottom(3v3GND) 0.406: R34.2 R33.2 R32.2
  Bottom(3v3GND) 0.61: C40.1 52.58,55.57 59.33,62.31 59.33,67.64 | 60.41,68.57 64.77,68.57 71.51,75.31 71.51,80.64 | J7.1 J6.1 | J5.1 99.08,27.39
  Bottom(3v3GND) 0.813: 60.41,68.57 C40.1 C39.1 43.87,55.57 C41.1 40.25,55.22 | 40.25,55.22 5REG.SOURCE | U$14.VIN 39.23,53.24 39.23,55.2 39.26,55.22 40.25,55.22
12V  (via drill 0.3, 0.35)
  Top(3v3+) 0.152: v113.02,122.94 110.43,125.53 R17.2
  Top(3v3+) 0.305: C4.1 59.23,72.41 C7.1
  Top(3v3+) 0.406: C7.1 59.2,70.79 59.68,70.31 v60.39,70.31 | U$4.1 77.7,78.78 77.99,78.49 77.99,77.78 78.17,77.6 v79.24,77.6 | U$1.1 66.72,79.66 v67.15,80.09
  Top(3v3+) 0.61: v115.24,115.3 115.87,115.93 115.87,118.98 PW_LED1.A | R23.1 9,101.96 v7.59,101.96
  Top(3v3+) 1.016: 3.3REG1.GATE 94.91,67.31 94.89,67.29 v94.53,67.64
  12V+ 0.406: v79.24,77.6 v80.48,77.6
  Bottom(3v3GND) 0.203: U$18.8 90.62,88.47 90.62,89.16 91.67,90.2 C33.1 v89.74,90.41 v89.73,90.4
  Bottom(3v3GND) 0.406: C2.1 80.48,79.21 | 80.48,79.21 82.04,79.21 C3.1 | v80.48,77.6 80.48,79.21
  Bottom(3v3GND) 0.813: 5REG.GATE 39.41,60.66 39.41,61.78 v37.28,63.91
  pour 12V+: -10.19,135.56 -10.19,16.62 19.85,-13.43 134,-13.43 153.56,6.12 153.56,125.96 133.11,146.41 0.65,146.41
12V-KICKER
  Top(3v3+) 0.254: C18.1 54.46,95.57 54.09,95.2 54.09,95.08 | 54.09,95.08 54.09,94.6 CHARGE_U.P$1 54.06,94.57 54.98,94.57 55.11,94.44 55.11,93.17 54.99,93.05 CHARGE_U.P$4 | 49.63,96.11 50.39,96.11 51.3,95.2 53.97,95.2 54.09,95.08 | 49.62,96.12 C23.1
  Top(3v3+) 0.61: 84.57,98.46 84.95,98.84 84.95,103.33 83.94,104.35 71.49,104.35 67.94,100.79 39.11,100.79 38.09,99.77 38.09,96.98 38.85,96.22 42.28,96.22 42.25,96.19 42.25,96.12
  Top(3v3+) 0.813: C20.1 C21.1 49.63,96.11 C23.1 | 42.25,96.12 49.62,96.12 49.65,96.09 C34.1
  Top(3v3+) 1.676: 86.86,95.96 86.86,98.44 U$3.P$4 84.57,98.46 U$3.P$5
  Top(3v3+) 1.78: 86.86,95.96 89.58,93.25 98.44,93.25 106.29,85.4 KICKER1.2
12VGND  (via drill 0.3, 0.35, 0.38, 0.7, 1.1 pad 2.79)  (25 unrouted)
  Top(3v3+) 0.203: 65.75,78.73 U$1.2 | R21.1 v115.11,121.44 v115.1,121.44 | v110.51,122.66 110.08,122.23 110.08,117.72 BATCLAMP2.A
  Top(3v3+) 0.254: v18.25,114 18,113.74 18.34,113.4 U$5.3 | 75.92,79.24 U$4.2
  Top(3v3+) 0.305: R25.2 37.58,109.61 38.52,110.56 38.52,116.69 U$6.LEFT | C7.2 61.72,75.23 C4.2 | 53.97,92.15 53.08,92.15 53.2,92.03 54.98,92.03 55.11,92.15 55.11,92.41 54.98,92.28 53.08,92.28 53.08,92.54 55.11,92.54 55.1,92.55 CHARGE_U.P$5 55.88,92.55 56.13,92.79 | 56.13,92.79 56.13,97.11 55.62,97.62 52.95,97.62 52.7,97.36 | 56.13,92.79 56.13,92.66 56,92.54 56.25,92.54 56.38,92.66 56.38,99.27 57.14,100.03 59.55,100.03 59.55,98.95 C19.2 59.55,98.88 59.55,96.36 RBG.1
  Top(3v3+) 0.508: U$4.2 75.92,80.21 v75.86,80.27 | U$1.2 65.77,80.05 v65.73,79.91 | C4.2 61.75,77.49 61.46,77.78 v61.1,77.78
  Top(3v3+) 0.61: 53.97,92.15 53.97,89.87 52.7,88.6 RSENSE.1 | U$19.1 87.63,45.45 87.6,45.42 v87.42,45.42
  Top(3v3+) 0.813: C18.2 52.7,96.41 52.7,97.36 52.7,98.25 52.02,98.92 C23.2 49.63,98.91 C21.2 C20.2 43.52,98.89 C34.2
  Top(3v3+) 1.27: RSENSE.1 51.19,85.83 v51.15,85.78
  Top(3v3+) 1.676: 38.79,123.19 U$6.LEFT
  Top(3v3+) 1.93: U$3.P$10 98.13,79.55 v98.16,79.58
  12VGND 0.406: v26.43,91.65 27.14,91.65 27.68,91.11 | v25.01,81.87 25.9,81.87 26.26,82.22 | 27.68,73.51 v26.61,74.58
  12VGND 0.508: v75.86,80.27 75.86,80.98 75.33,81.51 | v65.73,79.91 65.73,80.62 65.19,81.16
  12VGND 1.27: v51.15,85.78 51.15,84.71 50.08,83.65
  Bottom(3v3GND) 0.152: C5.2 99.31,111.43 | CLAMP2.A 101.74,114.71 101.82,114.63
  Bottom(3v3GND) 0.203: v114.72,124.08 114.72,123.93 114.93,123.73
  Bottom(3v3GND) 0.305: 101.52,114.63 101.82,114.63 102.61,114.63 102.87,114.37 CAP_SENSE_BUF.2 102.87,112.72 102.61,112.98 99.94,112.98 99.31,112.35 99.31,111.43 | R15.1 101.48,124.35 101.29,124.36 100.22,124.36 v100.04,124.01 | v75.86,80.27 75.86,80.62 77.11,81.87 79.29,81.87 79.38,81.96
  Bottom(3v3GND) 0.406: 82.62,81.43 C3.2 79.38,81.96 C2.2 | KICK_Q1.SOURCE 26.43,92.89 v26.43,91.65 | DRIB_TRAN.SOURCE 24.19,82.69 v25.01,81.87 | KICK_Q.SOURCE 25.58,75.61 v26.61,74.58
  Bottom(3v3GND) 0.508: CLAMP2.A 98.92,114.71 v98.44,114.23
  pour 12VGND: -14.99,149.25 168.67,149.25 168.67,-24.28 169.38,-24.99 -14.99,-24.99
BAT+  (2 unrouted)
  pour Top(3v3+): 131.87,63.91 141.29,63.91 142.71,62.49 142.71,58.58 140.94,58.58 140.4,58.04 140.4,48.62 139.34,47.55 130.8,47.55 129.91,48.44 129.91,61.95
BATSENSE  (via drill 0.35, 0.5)  (4 unrouted)
  Top(3v3+) 0.203: v104.31,82.4 104.13,82.4 | v115.87,112.27 117.34,112.27 BAT.P$1
  Top(3v3+) 0.254: R17.1 112.04,129.13 R18.2
  Bottom(3v3GND) 0.203: v104.31,82.4 104.49,82.58 104.49,82.93 113.38,91.82 113.38,109.78 v115.87,112.27
  Bottom(3v3GND) 0.406: v113.76,128.83 113.5,128.83
BB_IN  (1 unrouted)
BB_OUT  (1 unrouted)
BREN0  (1 unrouted)
BREN1  (1 unrouted)
BREN2  (1 unrouted)
BREN3  (1 unrouted)
CAP+  (via drill 0.7)
  Top(3v3+) 0.813: 30.04,102.95 31.23,104.14 31.23,114.94 28.89,117.28 U$7.+
  Top(3v3+) 1.016: v29.58,102.95 30.04,102.95 | 4.67,79.81 KICK.1
  Top(3v3+) 1.27: CHIP.1 3.12,92.14 2.79,91.81 2.79,81.51 | 2.79,81.51 | KICK.1 2.79,81.51
  Top(3v3+) 2.184: C6.+ 66.97,115.19 77.21,125.43 91.87,125.43 C14.+
  Bottom(3v3GND) 0.203: 4.67,79.81 KICK.1
  Bottom(3v3GND) 0.305: C14.+ 102.76,125.39 R14.2
  Bottom(3v3GND) 0.61: R24.2 79.39,101.46 CHARGE_D.C | CAP+_TEST.P$1 35.02,102.93 35.04,102.95
  Bottom(3v3GND) 0.813: KICK_FLY.CATHODE 10.03,82.68 | CHIP_FLY.CATHODE 10.48,95.01 7.41,98.07
  Bottom(3v3GND) 1.016: 29.53,102.9 v29.58,102.95
  Bottom(3v3GND) 1.27: 10.03,82.68 6.82,82.68 4.67,80.52 4.67,79.81 | CHIP.1 4.69,96.17 5.51,96.17 7.41,98.07 9.14,98.07 13.43,102.37 23.46,102.37 24.2,102.9 29.53,102.9
  Bottom(3v3GND) 1.778: C6.+ 50.2,115.19 37.96,102.95 35.04,102.95 v29.58,102.95 | 91.87,125.43 C14.+
  Bottom(3v3GND) 2.184: C14.+ 88.6,125.39 85.97,122.76 85.97,108.24 CHARGE_D.C
CHARGE  (via drill 0.35, 0.5, 0.6)  (1 unrouted)
  Top(3v3+) 0.203: v49.65,92.66 51.93,92.66 52.82,93.55 CHARGE_U.P$3
  Top(3v3+) 0.305: CHARGE_LED.A v36.44,92.54
  Bottom(3v3GND) 0.178: CHARGE.P$1 47.1,83.15 47.41,83.47 51.86,83.47 53.1,84.71 53.1,87.05 48.14,92.01
  Bottom(3v3GND) 0.203: 48.76,91.39 48.76,91.77 v49.65,92.66 | v53.1,71.73 46.5,78.34 CHARGE.P$1
  Bottom(3v3GND) 0.305: v36.44,92.54 47.62,92.54 48.14,92.01 48.76,91.39
CHARGE_DONE  (via drill 0.35)  (1 unrouted)
  Top(3v3+) 0.254: DONE.P$1 39.65,83.23 38.6,84.28 38.6,93.04 39.62,94.06 42.91,94.06 42.92,94.05 | 43.79,94.06 43.81,94.05
  Top(3v3+) 0.305: CHARGE_U.P$2 43.81,94.05 42.92,94.05 42.78,94.05 42.54,93.81 42.54,92.95 R22.2 42.54,92.81 42.54,89.87 42.97,89.44 R12.2
  Bottom(3v3GND) 0.203: v51.68,71.73 41.9,81.51 DONE.P$1
CHIP  (via drill 0.35)  (1 unrouted)
  Top(3v3+) 0.203: 68.39,71.76 ANDS.P$3 | 68.44,71.81 ANDS.P$3 | 64.72,78.84 U$1.3 64.2,78.75 63.86,78.4 63.86,74.31 63.95,74.22 | ANDS.P$3 65.82,71.82 v65.73,71.91 | v64.84,74.04 64.13,74.04 63.95,74.22 | CHIP_LED.A 16.16,88.94 20.57,84.53 20.57,79.91 21.28,79.2 | 63.95,74.22 63.59,73.87
  Bottom(3v3GND) 0.203: v65.73,71.91 64.84,72.8 v64.84,74.04
CHIP_ENABLE  (via drill 0.3)  (2 unrouted)
  Top(3v3+) 0.203: 19.7,89.51 CE_LED.A 24.91,89.79 25.54,89.16 26.97,89.16 27.68,88.45 v27.68,86.49 | ANDS.P$6 74.35,71.82 74.62,71.56 74.62,70.67 74.26,70.31 66.78,70.31
  Bottom(3v3GND) 0.203: v48.48,71.73 35.86,84.36 29.81,84.36 v27.68,86.49
COMP_OUT  (via drill 0.3)
  Top(3v3+) 0.203: R29.2 69.99,75.19 69.99,76 70.53,76.53 70.53,80.62 71.06,81.16 71.06,84.36 71.12,84.42 U$22.G 72.96,84.42 73.19,84.18 73.19,83.11 74.26,82.05 v75.87,82.05
  Top(3v3+) 0.254: ANDS.P$5 72.03,71.17 70.12,73.08 | 70.12,73.08 68.49,73.08 ANDS.P$1 | 70.12,73.08 70.12,74.79 R29.2
  Bottom(3v3GND) 0.203: U$18.7 80.75,87.11 75.86,82.22 v75.86,82.05 v75.87,82.05
CTS  (1 unrouted)
DIR0  (1 unrouted)
DIR1  (1 unrouted)
DIR2  (1 unrouted)
DIR3  (1 unrouted)
  Top(3v3+) 0.152: 77.82,24.36 J2.8
DISCHARGE  (via drill 0.3)  (2 unrouted)
  Top(3v3+) 0.203: R26.1 18.82,103.79 | 19.18,96.77 25.9,90.05 27.68,90.05 28.57,89.16 v28.57,88.45
  Bottom(3v3GND) 0.203: v50.26,71.73 34.26,87.73 28.57,87.73 v28.57,88.45
DIVCAP
  Bottom(3v3GND) 0.203: R8.1 103.78,109.02 103.75,109.05
  Bottom(3v3GND) 0.254: R8.1 105.39,110.15 109.82,114.58 111.07,114.58 112.85,112.79 CAP/100.P$1
  Bottom(3v3GND) 0.305: CAP_SENSE_BUF.1 101.92,110.75 102.1,110.57 103.75,110.57 103.75,109.05 CAP_SENSE_BUF.4
DRIB  (via drill 0.3)  (1 unrouted)
  Bottom(3v3GND) 0.203: v46.88,71.91 35.32,83.47 28.92,83.47 26.61,85.78 DRIB_TEST.P$1
  Bottom(3v3GND) 0.305: DRIB_TEST.P$1 24.27,87.98 DRIB_TRAN.GATE
ENABLE0  (1 unrouted)
  Top(3v3+) 0.152: J1.4 60.57,24.36
ENABLE1  (1 unrouted)
ENABLE2  (1 unrouted)
ENABLE3  (1 unrouted)
FAULT0  (1 unrouted)
  Top(3v3+) 0.152: J1.2 63.06,24.31
FAULT1  (1 unrouted)
  Top(3v3+) 0.254: U$21.24 109.56,57.86
FAULT2  (1 unrouted)
FAULT3  (1 unrouted)
GND  (via drill 0.3, 0.35, 0.5, 1)  (50 unrouted)
  Top(3v3+) 0.152: v30.52,39.02 22.17,39.02 v20.21,40.97 | J1.9 arc90 52.86,27.1 BB_CON.3
  Top(3v3+) 0.203: U$22.S 72.13,82.43 72.13,81.33 v73.02,80.45 73.02,80.27 | R4.2 16.78,83.72 R9.1 16.75,84.43 v13.81,87.38 | R11.2 33.54,89.55 v33.54,90.94 | 18.33,106.07 18.35,106.05 v20.03,106.05 | U$17.10 22.13,43.07 21.45,42.4 20.28,42.4 C35.2 | C35.2 18.15,42.41 C36.2 | C35.2 20.26,41.2 20.21,41.15 v20.21,40.97 | U$17.17 U$17.16 U$17.15 30.53,39.39 30.52,39.37 v30.52,39.02 | ANDS.P$4 66.58,71.17 v66.08,70.67
  Top(3v3+) 0.254: C15.2 72.59,69.1 v72.81,69.12 | U$5.2 18.33,106.07 | U$21.16 U$21.15 109.63,51.12 109.64,51.11 | C38.2 114.11,55.18 C37.2 115.19,55.16 115.33,55.02 v115.33,54.31
  Top(3v3+) 0.305: R10.1 18.27,100.62 R5.2 | BB_CON.5 36.56,23.1 35.5,24.16 35.5,27.11 35.55,27.16 C12.2 39.13,27.16 BB_CON.3 | 132.92,27.8 132.94,27.82 v132.94,28.17 | C10.1 121.38,102.49 120.49,101.6 v120.49,101.78
  Top(3v3+) 0.61: U$19.2 88.93,43.64 v87.42,43.64
  Top(3v3+) 1.016: C8.2
  Top(3v3+) 2.54: 3.3REG1.DRAIN 94.56,56.48 94.53,56.44 v94.53,56.26
  Bottom(3v3GND) 0.203: v73.02,80.45 73.02,80.09
  Bottom(3v3GND) 0.254: v72.81,69.12 72.61,69.17 72.76,69.32
  other vias: 130.09,26.22 57.55,70.31 109.64,50.93
  pour Bottom(3v3GND): 67.68,-10.59 119.07,-10.59 147.69,18.04 147.69,109.07 113.02,143.74 34.61,143.74 -3.44,105.69 -3.44,20.53 27.32,-10.23 67.33,-10.23
INT1  (via drill 0.35)  (2 unrouted)
  other vias: 71.59,33.51
INT2  (1 unrouted)
KICK  (via drill 0.35, 0.5)  (2 unrouted)
  Top(3v3+) 0.203: v73.78,79.12 74.08,79.12 74.44,78.77 74.96,78.77 U$4.3 | KICK_LED.A 16.41,78.07 16.65,78.31
  Top(3v3+) 0.254: U$4.3 74.97,77.88 74.18,77.09 74.18,75.06 74.44,74.81 74.44,72.62 74.29,72.47 ANDS.P$7
  Bottom(3v3GND) 0.203: 71.54,79.12 v73.78,79.12 | v55.41,75.47 55.24,75.47
KICK_ENABLE  (2 unrouted)
  Top(3v3+) 0.203: ANDS.P$2 66.41,72.47 65.55,73.33 64.3,73.33 64.13,73.51 | KE_LED.A 21.06,76.85 21.81,77.6
KICK_REF  (via drill 0.35)  (1 unrouted)
  Top(3v3+) 0.203: v103.06,83.65 v103.08,83.63
  Bottom(3v3GND) 0.203: R37.1 100.17,84.19 100.53,83.82 103.24,83.82 v103.06,83.65 103.06,83.29
LOCKN0  (1 unrouted)
  Top(3v3+) 0.152: U$17.1 16.07,48.92 14.88,47.73 14.88,37.42 15.05,37.24
LOCKN1  (1 unrouted)
LOCKN2  (1 unrouted)
LOCKN3  (1 unrouted)
  Top(3v3+) 0.152: J2.10 75.2,24.44
LOWCHIP
  Bottom(3v3GND) 0.813: CHIP.2 4.69,90.66 | CHIP_FLY.ANODE 10.37,87.76 | KICK_Q1.DRAIN 18.01,93.59 17.76,93.35
  Bottom(3v3GND) 1.27: 4.69,90.66 7.59,87.76 10.37,87.76 | CHIP_FLY.ANODE 10.48,89.63 14.19,93.35 17.76,93.35
LOWKICK
  Bottom(3v3GND) 0.813: KICK_Q.DRAIN 17.29,79.12
  Bottom(3v3GND) 1.27: KICK.2 7.17,75.12 KICK_FLY.ANODE 10.47,76.68 12.92,79.12 17.29,79.12
M1QA-1  (1 unrouted)
M1QA-1OUT  (2 unrouted)
  Bottom(3v3GND) 0.203: 96.08,34.41 R59.1 95.77,34.71
M1QA-2  (1 unrouted)
  Bottom(3v3GND) 0.203: J6.2 79.37,64.93 74.26,59.82 60.39,59.82 | 59.5,58.93 59.5,56.99 R52.2
M1QA-2OUT  (1 unrouted)
  Bottom(3v3GND) 0.203: R52.1 59.48,55.16 R53.1 61.18,54.93
M1QA-3
  Bottom(3v3GND) 0.203: J7.2 87.82,64.62 84.57,64.62 84.22,64.27 84.22,58.75 83.33,57.86 69.82,57.86 69.41,57.46 R54.2
M1QA-3OUT  (1 unrouted)
  Bottom(3v3GND) 0.203: R54.1 67.48,55.19 R55.1
M1QA-4  (via drill 0.35)  (1 unrouted)
  Bottom(3v3GND) 0.203: v86.17,30.84 86.17,32.63 R56.2
M1QA-4OUT  (2 unrouted)
  Bottom(3v3GND) 0.203: 86.17,34.43 R56.1
M1QB-1  (via drill 0.3)  (2 unrouted)
  Bottom(3v3GND) 0.203: 99.95,32.62 R50.2
  other vias: 101.64,32.62
M1QB-1OUT  (2 unrouted)
  Bottom(3v3GND) 0.203: R50.1 99.92,34.41
M1QB-2  (1 unrouted)
  Bottom(3v3GND) 0.203: J6.4 81.17,58.58
M1QB-2OUT  (1 unrouted)
  Bottom(3v3GND) 0.203: R44.1 63.47,55.14 R45.1
M1QB-3
  Bottom(3v3GND) 0.203: J7.4 85.22,56.94 R46.2
M1QB-3OUT  (1 unrouted)
  Bottom(3v3GND) 0.203: R46.1 73.25,55.16 R47.1 71.24,55.08
M1QB-4  (1 unrouted)
  Bottom(3v3GND) 0.203: R48.2 90.26,32.48
M1QB-4OUT  (2 unrouted)
  Bottom(3v3GND) 0.203: R49.1 92.3,34.51
N$1
  Top(3v3+) 0.152: DRAIN.P$1 60.56,83.11 60.57,83.11
  Top(3v3+) 0.61: 61.97,83.11 SWITCH_Q.DRAIN
  pour Top(3v3+): 60.19,89.36 77.33,89.36 88.26,78.31 88.26,73.99 88,73.74 82.03,73.74 81.53,74.25 81.53,81.49 75.94,86.82 70.22,86.82 69.21,85.8 69.21,81.61 60.19,81.61
N$2  (via drill 0.35)  (2 unrouted)
  Top(3v3+) 0.203: U$4.5 76.87,74.81 v76.93,74.76
  Bottom(3v3GND) 0.152: v76.93,74.76 76.93,58.95 | v27.68,76.71 27.04,76.71 25.9,77.85 25.3,77.85
  Bottom(3v3GND) 0.203: 25.3,77.85 R1.1
  other vias: 35.5,31.19
N$3
  Bottom(3v3GND) 0.305: R2.2 22.92,99.32 KICK_Q1.GATE
N$4
  Top(3v3+) 0.152: R28.2 136.91,99.47 U$15.16
N$5  (via drill 0.35)  (1 unrouted)
  Top(3v3+) 0.203: U$1.5 65.73,77.14 | 65.73,77.14 65.73,77.24 | 65.73,77.14 v65.73,77.07 | v25.9,97.51 25.9,93.96 29.46,90.4 29.46,81.87
  Bottom(3v3GND) 0.203: R2.1 25.54,97.87 v25.9,97.51 | v65.73,77.07 64.13,78.67 v62.53,78.67 62.35,78.67
N$6
  Top(3v3+) 0.254: CHARGE_U.P$8 59.8,93.55 60.57,94.31 69.82,94.31 72.84,91.29 72.84,90.35 R31.1 72.69,90.5
N$7
  Top(3v3+) 0.305: C19.1 57.79,96.33 RBG.2 57.8,95.56 57.9,95.46 58.16,95.46 58.28,95.33 58.28,94.58 CHARGE_U.P$10
N$8
  Bottom(3v3GND) 0.305: R1.2 23.46,79.4 KICK_Q.GATE
N$9  (via drill 0.5)
  Top(3v3+) 0.254: SWITCH_Q.GATE 68.91,91.61 v68.95,91.65
  Top(3v3+) 0.305: R43.2 66.29,90.87 SWITCH_Q.GATE
  Bottom(3v3GND) 0.254: v68.95,91.65 68.95,96.09 66.79,98.25 64.89,98.25 GATE.P$1
N$10  (2 unrouted)
  Top(3v3+) 0.406: 34.66,115.14 34.66,112.94 U$2.LOWER_RIGHT
N$11
  Top(3v3+) 0.203: 19.47,80.9 KE_LED.C
  Top(3v3+) 0.305: R4.1 19.23,81.15 19.47,80.9
N$12
  Top(3v3+) 0.254: CHARGE_U.P$9 59.42,94.05 60.32,94.95 72.2,94.95 75.51,91.65 75.51,90.41 RVOUT.1
N$13
  Top(3v3+) 0.305: R5.1 18.3,98.34 18.82,97.81 19.06,97.81 19.44,97.42 19.44,92.81 CE_LED.C
N$14
  Top(3v3+) 0.254: R6.1 69.82,80.1 69.82,80.8 70.53,81.51 70.53,85.25 70.71,85.42 73.73,85.42 74.62,84.71 U$22.D
N$15
  Top(3v3+) 0.305: R9.2 16.75,81.17 16.32,80.73 16.32,79.91 KICK_LED.C
N$16
  Top(3v3+) 0.152: R30.2 136.91,91.29 U$15.12
N$17
  Top(3v3+) 0.305: R10.2 16.35,98.33 16.13,98.11 16.13,92.81 CHIP_LED.C
N$18  (2 unrouted)
  Top(3v3+) 0.305: R13.1 11,102.6 R16.2 | 20.4,111.5 R3.2 21.04,106.56 20.72,106.24 16.57,106.24
N$19
  Top(3v3+) 0.305: DONE_LED.C 41.47,87.15 42.03,87.71 43.31,87.71 R12.1
N$20
  Top(3v3+) 0.305: R11.1 34.39,87.73 34.79,87.33 36.21,87.33 CHARGE_LED.C
N$21
  Top(3v3+) 0.305: R25.1 35.04,107.48 U$2.LOWER_LEFT
N$23
  Top(3v3+) 0.254: R21.2 118.87,121.44 119.17,121.14 119.17,119.3 PW_LED1.C
N$24
  Top(3v3+) 0.254: 58.31,91.11 58.41,91.01
  Top(3v3+) 0.305: 58.31,91.11 CHARGE_U.P$6
  Top(3v3+) 1.93: RSENSE.2 56.79,89.9 57.9,91.01 58.41,91.01 61.83,91.01 SWITCH_Q.SOURCE
N$25  (via drill 0.35)
  other vias: 49.19,18.39
N$26  (via drill 0.35)
  other vias: 51.32,18.39
N$27  (via drill 0.35)
  other vias: 53.46,18.39
N$28  (via drill 0.35)
  other vias: 55.59,18.39
N$29  (1 unrouted)
  Top(3v3+) 0.305: R23.2 11,104.4 R16.1
N$30  (1 unrouted)
  Top(3v3+) 0.305: U$5.1 15.55,106.33
N$31  (via drill 0.35)
  other vias: 57.73,18.39
N$32
  Top(3v3+) 0.305: BB_CON.4 36.38,25.1 R19.2
N$33
  Top(3v3+) 0.254: R6.2 71.55,79.91 72.31,79.91 72.28,79.89 KICK_READY.C
N$34
  Top(3v3+) 0.305: CHARGE_U.P$7 60.32,93.05 61.08,93.81 64.51,93.81 64.76,93.55 R43.1
N$35  (via drill 0.35)
  Bottom(3v3GND) 0.203: R8.2 107.31,108.89 v108.4,108.89 112.67,104.63 112.67,94.85 106,88.18 96.97,88.18 U$18.2
N$36  (via drill 0.7)
  Top(3v3+) 1.016: v26.99,115.85 26.99,111.14 U$2.TAB
  Bottom(3v3GND) 1.016: U$7.- 35.3,127.89 37.35,125.2 37.51,125.2 39.44,123.27 39.54,123.27 41.93,120.88 41.93,118.14 40.15,116.36 27.5,116.36 v26.99,115.85
N$37  (via drill 0.35)
  other vias: 59.86,18.39
N$38
  Bottom(3v3GND) 0.2: C13.2 60.58,44.7 U$8.8 U$8.7 62.78,46.03 63.06,46.31 63.59,46.31 63.77,46.49 R32.1
N$39  (via drill 0.35)
  other vias: 61.99,18.39
N$40
  Top(3v3+) 0.203: R20.2 39.17,31.08 BB_CON.1
N$41  (via drill 0.35)
  other vias: 64.13,18.39
N$42  (via drill 0.35)
  other vias: 66.26,18.39
N$43  (via drill 0.35)
  other vias: 68.39,18.39
N$65
  Bottom(3v3GND) 0.203: U$18.3 98.77,85.84 R37.2
PWM0  (1 unrouted)
PWM1  (1 unrouted)
PWM2  (1 unrouted)
  Top(3v3+) 0.203: 49.01,61.42 49.01,62.33 J4.7
PWM3  (1 unrouted)
RTS  (1 unrouted)
  Top(3v3+) 0.203: 132.05,99.46 R28.1
RX  (1 unrouted)
SCL  (2 unrouted)
SCL-H  (via drill 0.35)  (3 unrouted)
  Top(3v3+) 0.152: 23.42,41.68 U$17.12
  Bottom(3v3GND) 0.152: R33.1 65.55,46.49 65.73,46.31 68.22,46.31 | 27.14,41.68 v26.97,41.68
  Bottom(3v3GND) 0.2: R33.1 65.37,47.39 65.37,48.09 65.19,48.26 62.88,48.26 61.92,47.3 60.75,47.3 U$8.6
  Bottom(3v3GND) 0.203: v58.26,47.37 58.34,47.3 60.75,47.3
SDA  (2 unrouted)
  Bottom(3v3GND) 0.203: U$8.4 54.88,48.97
SDA-H  (via drill 0.35)  (3 unrouted)
  Top(3v3+) 0.152: 23.36,41.15 U$17.13
  Bottom(3v3GND) 0.2: R34.1 67.33,48.09 66.79,48.62
  Bottom(3v3GND) 0.203: 66.79,48.62 62.53,48.62 | 62.53,48.62 60.57,48.62 U$8.5 | 62.53,48.62 62.53,50.22 v62.35,50.4
  other vias: 26.08,40.44
TO_DRIB
  Bottom(3v3GND) 0.813: 6.87,85.17 6.31,84.61 | DRIB_TRAN.DRAIN 17.85,85.17
  Bottom(3v3GND) 1.27: 6.31,84.61 DRIB.2 | 17.85,85.17 6.87,85.17
TO_NEON
  Bottom(3v3GND) 0.254: 75.95,99.66 NEON.1
  Bottom(3v3GND) 0.61: 75.95,99.66 R24.1
TRANS_OUT  (via drill 1.3 pad 2.79)
  Top(3v3+) 2.184: v93.59,108.03 93.59,106.76 98.16,102.19 98.16,97.87 98.04,97.74 98.04,98.37 U$3.P$1
  Bottom(3v3GND) 2.184: CHARGE_D.A 93.48,108.14 v93.59,108.03
TX  (1 unrouted)
  Top(3v3+) 0.152: 115.51,103.38 U$15.3
UNBUF_DIVCAP
  Bottom(3v3GND) 0.305: CLAMP2.C 101.48,118.85 R15.2 104.58,121.7 R14.1 104.61,120.76 105.02,120.35 105.02,118.83 CLAMP1.A 106.31,118.8 106.93,118.19 106.93,112.22 106.29,111.59 CAP_SENSE_BUF.3

## Text on the board
Dimension: Dimensions in mm
Document: MOTHERBOARD